# EAGLE board HM_Nightfall-mini_v1 (EAGLE 9.6.2)
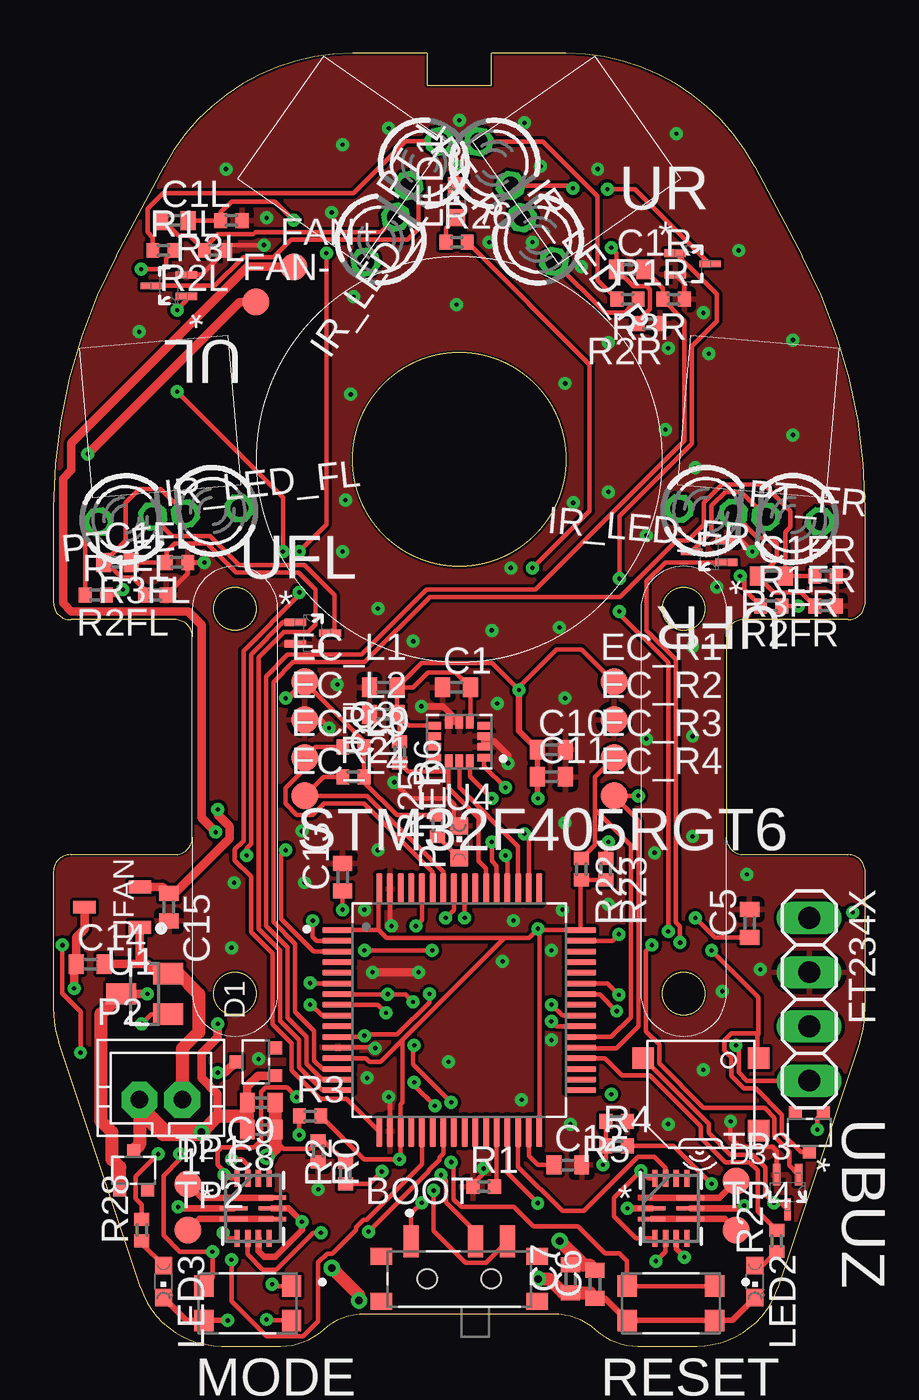
[diagram p0: board, top side]
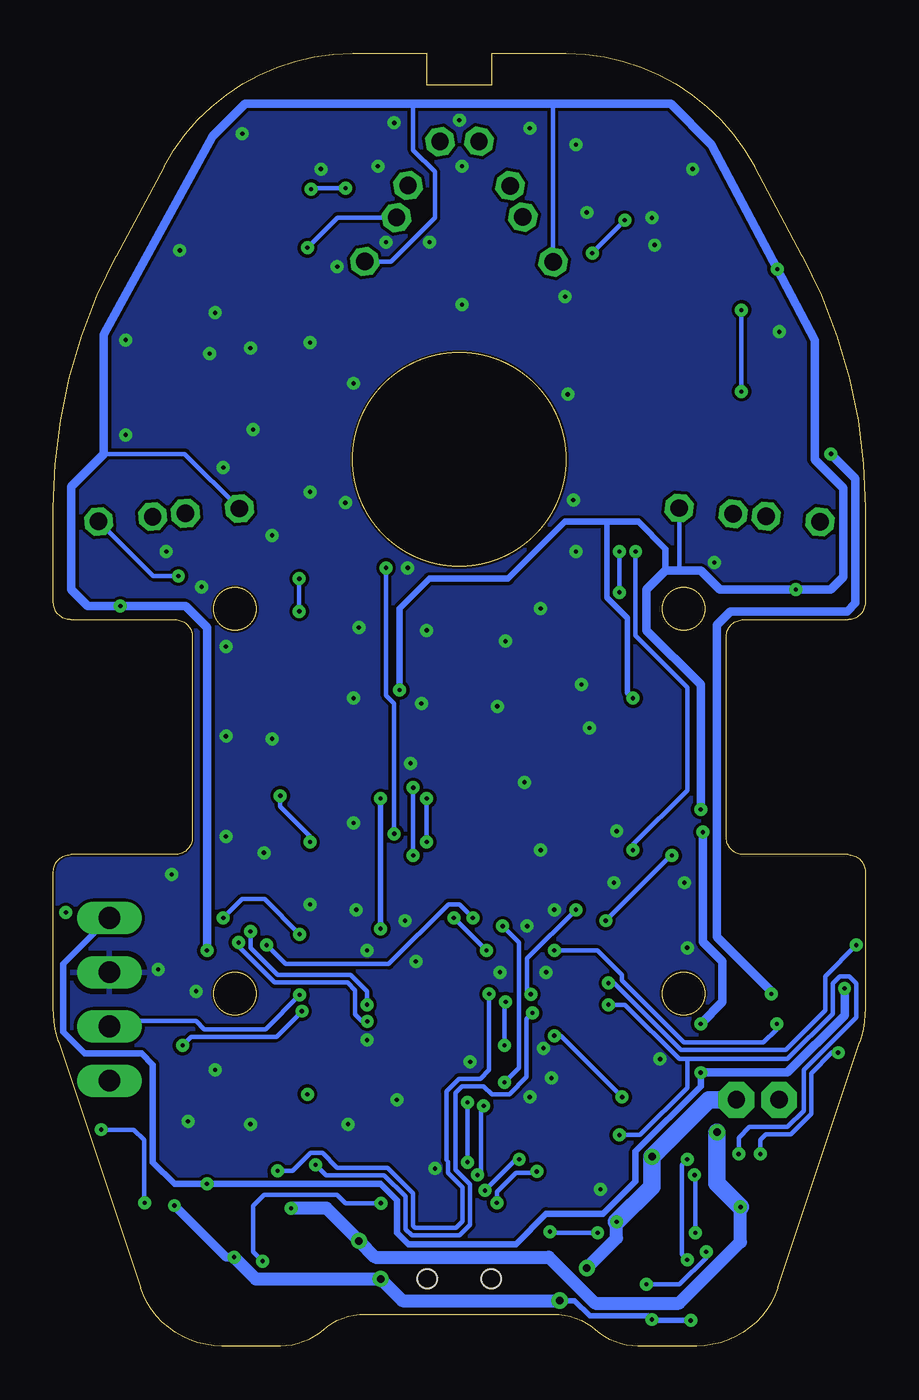
[diagram p1: board, bottom side, seen from below]

Size 38 x 60.5 mm. Coordinates in mm from the lower left corner, seen from the top.
Outline: 17.5,60.5 17.5,59 20.5,59 20.5,60.5 24,60.5 arc-62 32.82,55.21 35.06,51.02 arc-28 38,39.25 38,34.8 arc-90 37.2,34 32.3,34 arc90 31.5,33.2 31.5,23.8 arc90 32.3,23 37.2,23 arc-90 38,22.2 38,15.81 arc-18 37.74,14.23 33.91,2.73 arc-72 30.12,0 27.37,0 arc-41 25.39,0.75 arc41 23.4,1.5 14.6,1.5 arc41 12.61,0.75 arc-41 10.63,0 7.88,0 arc-72 4.09,2.73 0.26,14.23 arc-18 0,15.81 0,22.2 arc-90 0.8,23 5.7,23 arc90 6.5,23.8 6.5,33.2 arc90 5.7,34 0.8,34 arc-90 0,34.8 0,39.25 arc-28 2.94,51.02 5.18,55.21 arc-62 14,60.5 17.5,60.5
Outline: circle at 19,41.5 radius 5
Outline: circle at 8.5,16.5 radius 1
Outline: circle at 29.5,34.5 radius 1
Outline: circle at 29.5,16.5 radius 1
Outline: circle at 8.5,34.5 radius 1
Copper layers (1*16): Top 0.035mm / dielectric 1.5mm / Bottom 0.035mm
Design rules "default *": minimum track width 6mil, minimum drill 0.2mm, track to track 6mil, track to pad 6mil, pad to pad 6mil, via to via 6mil, smd to smd 6mil, copper to edge 0.1mm, drill to drill 0.15mm, minimum pad ring 10mil, minimum via ring 8mil, stop-mask expansion 4mil, vias tented up to drill 100mil, thermal gap 10mil
Net classes: 1 power: width 0.152 mm; 2 motor: width 0.152 mm

## Footprints (pad centres in the part's own frame; a part is rotated, then mirrored left to right if it is on the bottom)
SW_EG1215AA = smd 0.7 x 1.5: 1 -2.25,1.75; 2 0.75,1.75; 3 2.25,1.75 | smd 1 x 0.8: S1 -3.65,1.05; S2 -3.65,-1.05; S3 3.65,-1.05; S4 3.65,1.05 | hole 0.9: -1.5,0; 1.5,0
C0402 = smd 0.7 x 0.9: 1 -0.65,0; 2 0.65,0
SOT323 = smd 0.6 x 0.6: 1 -0.65,-0.925; 2 0.65,-0.925; 3 0,0.925
B1,27 = smd 1.27 x 1.27: TP 0,0
1X04 = drill 1.016 long: 1 -3.81,0; 2 -1.27,0; 3 1.27,0; 4 3.81,0
LED3MM = drill 0.813 octagon: A -1.27,0; K 1.27,0
CHIPLED_0603 = smd 0.8 x 0.8: A 0,-0.75; C 0,0.75
SW_TL6330AF200Q = smd 0.9 x 1: 1 -2.05,-0.8; 2 2.05,-0.8; 3 -2.05,0.8; 4 2.05,0.8
JST-PH2 = drill 0.813 pad 1.676 octagon: 1 1,0; 2 -1,0
R0402 = smd 0.6 x 0.7: 1 -0.5,0; 2 0.5,0
SMT-0540-S-R = smd 1 x 1: + 1.7,-2.7; - 1.7,2.7; M -1.7,-2.7
QFP50P1200X1200X160-64N = smd 1.47 x 0.28: 1 -5.67,3.75; 2 -5.67,3.25; 3 -5.67,2.75; 4 -5.67,2.25; 5 -5.67,1.75; 6 -5.67,1.25; 7 -5.67,0.75; 8 -5.67,0.25; 9 -5.67,-0.25; 10 -5.67,-0.75; 11 -5.67,-1.25; 12 -5.67,-1.75; 13 -5.67,-2.25; 14 -5.67,-2.75; 15 -5.67,-3.25; 16 -5.67,-3.75; 33 5.67,-3.75; 34 5.67,-3.25; 35 5.67,-2.75; 36 5.67,-2.25; 37 5.67,-1.75; 38 5.67,-1.25; 39 5.67,-0.75; 40 5.67,-0.25; 41 5.67,0.25; 42 5.67,0.75; 43 5.67,1.25; 44 5.67,1.75; 45 5.67,2.25; 46 5.67,2.75; 47 5.67,3.25; 48 5.67,3.75 | smd 0.28 x 1.47: 17 -3.75,-5.67; 18 -3.25,-5.67; 19 -2.75,-5.67; 20 -2.25,-5.67; 21 -1.75,-5.67; 22 -1.25,-5.67; 23 -0.75,-5.67; 24 -0.25,-5.67; 25 0.25,-5.67; 26 0.75,-5.67; 27 1.25,-5.67; 28 1.75,-5.67; 29 2.25,-5.67; 30 2.75,-5.67; 31 3.25,-5.67; 32 3.75,-5.67; 49 3.75,5.67; 50 3.25,5.67; 51 2.75,5.67; 52 2.25,5.67; 53 1.75,5.67; 54 1.25,5.67; 55 0.75,5.67; 56 0.25,5.67; 57 -0.25,5.67; 58 -0.75,5.67; 59 -1.25,5.67; 60 -1.75,5.67; 61 -2.25,5.67; 62 -2.75,5.67; 63 -3.25,5.67; 64 -3.75,5.67
SOT95P280X145-3N = smd 1.05 x 0.6: 1 -1.3,0.95; 2 -1.3,-0.95; 3 1.3,0
QFN-14_MP6551_MNP = smd 0.127 x 0.127: 1 -0.95,0.5 | smd 1.3 x 0.2: 2 -0.9,0; 3 -0.9,-0.5; 8 0.9,-0.5; 9 0.9,0; 10 0.9,0.5 | smd 0.25 x 0.8: 4 -0.75,-1.4; 5 -0.25,-1.4; 6 0.25,-1.4; 7 0.75,-1.4; 11 0.75,1.4; 12 0.25,1.4; 13 -0.25,1.4; 14 -0.75,1.4
PQFN50P250X300X86-14N = smd 0.61 x 0.35: 1 -1.16,0.75; 2 -1.16,0.25; 3 -1.16,-0.25; 4 -1.16,-0.75; 8 1.16,-0.75; 9 1.16,-0.25; 10 1.16,0.25; 11 1.16,0.75 | smd 0.35 x 0.61: 5 -0.5,-0.91; 6 0,-0.91; 7 0.5,-0.91; 12 0.5,0.91; 13 0,0.91; 14 -0.5,0.91
SOT50P160X90-3N = smd 1.016 x 0.356: 1 -0.813,0.508; 2 -0.813,-0.508 | smd 1.016 x 0.305: 3 0.813,0
SOT23 = smd 1 x 1.4: 1 -0.95,-1.1; 2 0.95,-1.1; 3 0,1.1

## Placement (x,y rotation side)
BOOT  EG1215AA  [SW_EG1215AA]  19,3.15 0 top
C1  0.1u  [C0402]  18.87,30.83 0 top
C1FL  0.1u  [C0402]  3,36.67 0 top
C1FR  0.1u  [C0402]  33.61,36.04 0 top
C1L  0.1u  [C0402]  5.66,52.68 0 top
C1R  0.1u  [C0402]  27,50.39 0 top
C2  0.1u  [C0402]  15.44,29.56 180 top
C3  2.2u  [C0402]  15.44,30.83 180 top
C5  2.2u  [C0402]  32.59,19.78 90 top
C6  0.1u  [C0402]  25.35,2.89 90 top
C7  10u  [C0402]  24.21,3.15 90 top
C8  0.1u  [C0402]  9.73,10.13 180 top
C9  10u  [C0402]  9.73,11.4 180 top
C10  10u  [C0402]  23.32,27.91 0 top
C11  0.1u  [C0402]  23.32,26.64 0 top
C12  2.2u  [C0402]  24.08,8.48 0 top
C13  0.1u  [C0402]  13.54,21.94 90 top
C14  1u  [C0402]  1.73,17.88 0 top
C15  2.2u  [C0402]  5.41,20.55 270 top
D1  BAS16WT1GW  [SOT323]  9.47,13.31 90 top
D2  BAS16WT1GW  [SOT323]  3.76,8.23 0 top
D3  BAS16WT1GW  [SOT323]  35.38,10 180 top
EC_L1  TPB1,27  [B1,27]  11.76,31.09 0 top
EC_L2  TPB1,27  [B1,27]  11.76,29.31 0 top
EC_L3  TPB1,27  [B1,27]  11.76,27.53 0 top
EC_L4  TPB1,27  [B1,27]  11.76,25.75 0 top
EC_R1  TPB1,27  [B1,27]  26.24,31.09 0 top
EC_R2  TPB1,27  [B1,27]  26.24,29.31 0 top
EC_R3  TPB1,27  [B1,27]  26.24,27.53 0 top
EC_R4  TPB1,27  [B1,27]  26.24,25.75 0 top
FAN+  TPB1,27  [B1,27]  11.25,50.52 0 top
FAN-  TPB1,27  [B1,27]  9.47,48.87 0 top
FT234X  [1X04]  35.38,16.23 270 top
IR_LED_FL  [LED3MM]  3.38,38.71 6 top
IR_LED_FR  [LED3MM]  34.62,38.71 175 top
IR_LED_L  [LED3MM]  17.35,55.34 235 top
IR_LED_R  [LED3MM]  20.65,55.34 306 top
LED1  [CHIPLED_0603]  18.87,53.57 0 top
LED2  [CHIPLED_0603]  32.84,3.02 180 top
LED3  [CHIPLED_0603]  5.16,3.02 180 top
MODE  TL6330AF200Q  [SW_TL6330AF200Q]  9.09,2 180 top
P2  [JST-PH2]  5.03,11.53 0 top
P-LED  [CHIPLED_0603]  19,23.59 0 top
PT_FL  [LED3MM]  7.44,39.09 186 top
PT_FR  [LED3MM]  30.56,39.09 355 top
PT_L  [LED3MM]  15.32,51.79 56 top
PT_R  [LED3MM]  22.68,51.79 126 top
R0  0  [R0402]  12.4,9.12 270 top
R1  10k  [R0402]  20.14,7.46 0 top
R1FL  10  [R0402]  1.98,35.15 0 top
R1FR  10  [R0402]  33.61,34.64 0 top
R1L  10  [R0402]  5.16,51.28 0 top
R1R  10  [R0402]  26.87,48.99 0 top
R2  10k  [R0402]  13.67,8.1 90 top
R2FL  20k  [R0402]  4.78,35.15 180 top
R2FR  20k  [R0402]  36.14,34.64 180 top
R2L  20k  [R0402]  7.57,51.28 180 top
R2R  20k  [R0402]  27.89,47.85 180 top
R3  10k  [R0402]  12.02,10.77 0 top
R3FL  3.3k  [R0402]  5.79,36.67 180 top
R3FR  3.3k  [R0402]  36.14,36.04 180 top
R3L  3.3k  [R0402]  8.33,52.68 180 top
R3R  3.3k  [R0402]  29.03,48.99 180 top
R4  22k  [R0402]  26.37,9.37 0 top
R5  10k  [R0402]  26.37,10.51 180 top
R6  10k  [R0402]  16.21,27.79 270 top
R20  470  [R0402]  14.05,28.04 0 top
R21  470  [R0402]  14.05,26.64 0 top
R22  470  [R0402]  24.71,22.32 270 top
R23  470  [R0402]  25.86,22.32 270 top
R25  1k  [R0402]  17.98,24.36 90 top
R26  1k  [R0402]  18.87,51.66 0 top
R27  1k  [R0402]  33.86,4.93 90 top
R28  1k  [R0402]  4.14,5.43 90 top
RESET  TL6330AF200Q  [SW_TL6330AF200Q]  28.91,2 180 top
SPK1  SMT-0540-S-R  [SMT-0540-S-R]  30.3,11.78 90 top
STM32F405RGT6  STM32F405RGT6  [QFP50P1200X1200X160-64N]  19,15.72 0 top
TP1  TPB1,27  [B1,27]  6.3,7.59 0 top
TP2  TPB1,27  [B1,27]  6.3,5.43 0 top
TP3  TPB1,27  [B1,27]  31.95,7.72 0 top
TP4  TPB1,27  [B1,27]  31.95,5.43 0 top
U1  AP2210N-3.3TRG1  [SOT95P280X145-3N]  2.74,20.55 180 top
U2  MP6551GQB-P  [QFN-14_MP6551_MNP]  28.91,6.45 0 top
U3  MP6551GQB-P  [QFN-14_MP6551_MNP]  9.35,6.45 0 top
U4  ISM330DHCXTR  [PQFN50P250X300X86-14N]  19,28.29 180 top
UBUZ  2N7002TQ-7-F  [SOT50P160X90-3N]  34.37,7.21 270 top
UFAN  2N7002K  [SOT23]  4.27,16.48 90 top
UFL  2N7002TQ-7-F  [SOT50P160X90-3N]  12.14,33.37 0 top
UFR  2N7002TQ-7-F  [SOT50P160X90-3N]  30.68,37.18 180 top
UL  2N7002TQ-7-F  [SOT50P160X90-3N]  5.41,49.63 180 top
UR  2N7002TQ-7-F  [SOT50P160X90-3N]  29.92,50.64 0 top

## Library data of the parts
BOOT = EG1215AA; AVAILABILITY: In Stock; CHECK_PRICES: https://www.snapeda.com/parts/EG1215AA/E-Switch/view-part/?ref=eda; DESCRIPTION: Slide Switch SPDT Surface Mount, Right Angle; MF: E-Switch; MP: EG1215AA; PACKAGE: None; PRICE: None; PURCHASE-URL: https://www.snapeda.com/api/url_track_click_mouser/?unipart_id=3210616&manufacturer=E-Switch&part_name=EG1215AA&search_term=eg1215aa; SNAPEDA_LINK: https://www.snapeda.com/parts/EG1215AA/E-Switch/view-part/?ref=snap
C1 C1FL C1FR C1L C1R C2 C3 C5-C15 = rcl; SPICEPREFIX: C
D1-D3 = BAS16WT1G; AVAILABILITY: In Stock; CHECK_PRICES: https://www.snapeda.com/parts/BAS16WT1G/Onsemi/view-part/?ref=eda; DESCRIPTION: DIODE, SIGNAL, 75V, SC70; Diode Type:Small Signal; Voltage, Vrrm:75V; Time, trr Typ:6ns; Voltage, Vf Max:1.25V; Temperature, Tj Max:150°C; Termination Type:SMD; Operating Temperature Range:-55°C to +150°C; Case Style:SC-70; No. of Pins:3; Voltage, Breakdown Max:75V; MF: ON Semiconductor; MP: BAS16WT1G; PACKAGE: SC-70-3 ON Semiconductor; PRICE: None; SNAPEDA_LINK: https://www.snapeda.com/parts/BAS16WT1G/Onsemi/view-part/?ref=snap
EC_L1-EC_L4 EC_R1-EC_R4 FAN+ FAN- TP1-TP4 = testpad
FT234X = pinhead
IR_LED_FL IR_LED_FR IR_LED_L IR_LED_R LED1-LED3 P-LED PT_FL PT_FR PT_L PT_R = led
MODE RESET = TL6330AF200Q; AVAILABILITY: In Stock; CHECK_PRICES: https://www.snapeda.com/parts/TL6330AF200Q/E-Switch/view-part/?ref=eda; DESCRIPTION: Tactile Switch SPST-NO Top Actuated Surface Mount; MF: E-Switch; MP: TL6330AF200Q; PACKAGE: None; PRICE: None; PURCHASE-URL: https://www.snapeda.com/api/url_track_click_mouser/?unipart_id=2720563&manufacturer=E-Switch&part_name=TL6330AF200Q&search_term=tl6330af200q; SNAPEDA_LINK: https://www.snapeda.com/parts/TL6330AF200Q/E-Switch/view-part/?ref=snap
P2 = jst-ph
R0 R1 R1FL R1FR R1L R1R R2 R2FL R2FR R2L R2R R3 R3FL R3FR R3L R3R R4-R6 R20-R23 R25-R28 = rcl; SPICEPREFIX: R
SPK1 = SMT-0540-S-R; DESCRIPTION: Buzzers Transducer, Externally Driven Electromechanical/Magnetic 3V 100mA 4kHz 78dB @ 3V, 10cm Surface Mount Solder Pads; DIGI-KEY_PART_NUMBER: 668-1060-1-ND; MF: PUI; MP: SMT-0540-S-R; PACKAGE: PUI; PURCHASE-URL: https://pricing.snapeda.com/search/part/SMT-0540-S-R/?ref=eda
STM32F405RGT6 = stm32_f405rgt6; AVAILABILITY: Unavailable; DESCRIPTION: ARM® Cortex®-M4 STM32F4 Microcontroller IC 32-Bit 168MHz 1MB (1M x 8) FLASH 64-LQFP (10x10); MF: STMicroelectronics; MP: STM32F405RGT6; PACKAGE: LQFP-64 STMicroelectronics; PRICE: None
U1 = AP2210N-3.3TRG1; AVAILABILITY: In Stock; CHECK_PRICES: https://www.snapeda.com/parts/AP2210N-3.3TRG1/Diodes+Inc./view-part/?ref=eda; DESCRIPTION: Voltage Regulators, LDO, 300mA CMOS LDO 3.3V 250mV | Diodes Inc AP2210N-3.3TRG1; MF: Diodes Inc.; MP: AP2210N-3.3TRG1; PACKAGE: SOT-23-3 Diodes Inc.; PRICE: None; PURCHASE-URL: https://www.snapeda.com/api/url_track_click_mouser/?unipart_id=492437&manufacturer=Diodes Inc.&part_name=AP2210N-3.3TRG1&search_term=ldo 3.3v; SNAPEDA_LINK: https://www.snapeda.com/parts/AP2210N-3.3TRG1/Diodes+Inc./view-part/?ref=snap
U2 U3 = MP6551; COPYRIGHT: Copyright (C) 2025 Ultra Librarian. All rights reserved.; MANUFACTURER_PART_NUMBER: MP6551GQB-P; MFR_NAME: Monolithic Power Systems
U4 = ISM330DHCXTR; AVAILABILITY: In Stock; CHECK_PRICES: https://www.snapeda.com/parts/ISM330DHCXTR/STMicroelectronics/view-part/?ref=eda; DESCRIPTION: Accelerometer, Gyroscope, Temperature, 6 Axis Sensor I2C, SPI Output; MF: STMicroelectronics; MP: ISM330DHCXTR; PACKAGE: VFLGA-14 STMicroelectronics; PRICE: None; SNAPEDA_LINK: https://www.snapeda.com/parts/ISM330DHCXTR/STMicroelectronics/view-part/?ref=snap
UBUZ UFL UFR UL UR = 2N7002TQ-7-F; AVAILABILITY: In Stock; CHECK_PRICES: https://www.snapeda.com/parts/2N7002TQ-7-F/Diodes+Inc./view-part/?ref=eda; DESCRIPTION: N-Channel 60 V 115mA (Ta) 150mW (Ta) Surface Mount SOT-523; MF: Diodes Inc.; MP: 2N7002TQ-7-F; PACKAGE: SOT-523 Diodes Inc.; PRICE: None; SNAPEDA_LINK: https://www.snapeda.com/parts/2N7002TQ-7-F/Diodes+Inc./view-part/?ref=snap
UFAN = nxp_60

## Nets
+3V3 [power]: BOOT.3 C1.2 C2.1 C3.1 C10.1 C11.1 C15.1 D3.3 EC_L1.TP EC_R1.TP PT_FL.A PT_FR.A PT_L.A PT_R.A R1FL.2 R1FR.2 R1L.2 R1R.2 R3.2 R6.1 R20.2 R21.2 R22.2 R23.2 R25.2 SPK1.+ STM32F405RGT6.1 STM32F405RGT6.13 STM32F405RGT6.19 STM32F405RGT6.32 STM32F405RGT6.48 STM32F405RGT6.64 U1.2 U4.5 U4.8
+5V [power]: C14.1 D1.3 FT234X.1 R4.2 U1.3
BOOT0: BOOT.2 STM32F405RGT6.60
BUZZER: STM32F405RGT6.57 UBUZ.1
CS: R6.2 STM32F405RGT6.54 U4.12
EC_L_A: EC_L4.TP R21.1 STM32F405RGT6.58
EC_L_B: EC_L3.TP R20.1 STM32F405RGT6.59
EC_R_A: EC_R4.TP R23.1 STM32F405RGT6.37
EC_R_B: EC_R3.TP R22.1 STM32F405RGT6.38
FAN: STM32F405RGT6.56 UFAN.1
GND [motor]: C1.1 C2.2 C3.2 C5.2 C10.2 C11.2 C12.2 C13.2 C15.2 EC_L2.TP EC_R2.TP FT234X.2 LED1.C P-LED.C R0.2 R1.1 R2FL.1 R2FR.1 R2L.1 R2R.1 R3FL.1 R3FR.1 R3L.1 R3R.1 R5.1 STM32F405RGT6.12 STM32F405RGT6.18 STM32F405RGT6.63 U4.2 U4.3 U4.6 U4.7 UBUZ.2 UFL.2 UFR.2 UL.2 UR.2
GND2 [motor]: C6.1 C7.1 C8.1 C9.1 C14.2 LED2.C LED3.C MODE.3 MODE.4 P2.1 R0.1 R2.2 RESET.3 RESET.4 U1.1 U2.6 U2.9 U3.6 U3.9 UFAN.2
IR_FL: STM32F405RGT6.2 UFL.1
IR_FR: STM32F405RGT6.39 UFR.1
IR_L: STM32F405RGT6.3 UL.1
IR_R: STM32F405RGT6.40 UR.1
LED_1: R26.2 STM32F405RGT6.50
LED_2: R27.2 STM32F405RGT6.36
LED_3: R28.2 STM32F405RGT6.6
MISO: STM32F405RGT6.52 U4.1
MOSI: STM32F405RGT6.53 U4.14
MOTOR_L_DIR: STM32F405RGT6.23 U3.5
MOTOR_L_OUT1 [motor]: TP1.TP U3.1 U3.10
MOTOR_L_OUT2 [motor]: TP2.TP U3.3 U3.8
MOTOR_L_PWM: STM32F405RGT6.21 U3.13
MOTOR_R_DIR: STM32F405RGT6.29 U2.5
MOTOR_R_OUT1 [motor]: TP3.TP U2.1 U2.10
MOTOR_R_OUT2 [motor]: TP4.TP U2.3 U2.8
MOTOR_R_PWM: STM32F405RGT6.30 U2.13
MOTOR_STBY: STM32F405RGT6.11 U2.4 U2.14 U3.4 U3.14
N$1: D2.1 FAN-.TP UFAN.3
N$2: IR_LED_FL.K UFL.3
N$3: C1FL.1 PT_FL.K R2FL.2
N$6: C1FR.1 PT_FR.K R2FR.2
N$8: IR_LED_FL.A R1FL.1
N$9: C1L.1 PT_L.K R2L.2
N$10: IR_LED_L.K UL.3
N$12: C1R.1 PT_R.K R2R.2
N$13: C5.1 STM32F405RGT6.47
N$14: C12.1 STM32F405RGT6.31
N$15 [motor]: R1.2 STM32F405RGT6.28
N$16: IR_LED_L.A R1L.1
N$18: IR_LED_FR.K UFR.3
N$19: BOOT.1 R2.1
N$21: P-LED.A R25.1
N$23: D3.1 SPK1.- UBUZ.3
N$27: LED1.A R26.1
N$28: IR_LED_FR.A R1FR.1
N$29: IR_LED_R.K UR.3
N$30: IR_LED_R.A R1R.1
N$36: LED2.A R27.1
N$41: LED3.A R28.1
PC_RX: FT234X.4 STM32F405RGT6.42
PC_TX: FT234X.3 STM32F405RGT6.43
PUSH_IN_1: MODE.1 MODE.2 R3.1 STM32F405RGT6.9
PUSH_IN_2: STM32F405RGT6.10
RESET: C13.1 RESET.1 RESET.2 STM32F405RGT6.7
SCK: STM32F405RGT6.51 U4.13
SENSOR_FL: C1FL.2 R3FL.2 STM32F405RGT6.16
SENSOR_FR: C1FR.2 R3FR.2 STM32F405RGT6.14
SENSOR_L: C1L.2 R3L.2 STM32F405RGT6.17
SENSOR_R: C1R.2 R3R.2 STM32F405RGT6.15
SWCL: STM32F405RGT6.49
SWDIO: STM32F405RGT6.46
VM [power]: C6.2 C7.2 C8.2 C9.2 D1.1 D2.3 FAN+.TP P2.2 U2.2 U3.2
VOL_CHECK: R4.1 R5.2 STM32F405RGT6.8

## Tracks (layer width: path | path; a pad name or v marks a point on that pad's centre or on a via)
+3V3  (via drill 0.2)
  Top 0.2: 22.74,19.47 STM32F405RGT6.48 24.67,21.78 R22.2 R23.2 | 22.74,19.47 v22.68,19.53 22.25,19.1 21.11,19.1 | STM32F405RGT6.1 15.23,19.47 | 15.23,19.47 15.6,19.1 21.11,19.1 | STM32F405RGT6.13 14.65,13.47 14.81,13.31 15.32,13.31 16.33,14.32 | 16.33,14.32 21.11,19.1 | 16.33,14.32 16.33,11.4 16.25,11.32 STM32F405RGT6.19 16.25,8.79 v16.19,8.74 14.54,8.74 R3.2 | STM32F405RGT6.32 22.75,19.46 22.74,19.47 | R1FR.2 v34.86,34.64 v34.87,34.63 | R1FL.2 3,35.15 v3.25,35.41 | BOOT.3 20.25,3.89 19.3,3.89 17.8,5.39 v17.8,7.28 | STM32F405RGT6.64 15.23,21.37 15.23,19.47 | EC_L1.TP 14.55,28.3 R20.2 R21.2 14.55,26.39 16.08,24.86 R25.2 | v30.81,18.51 33,16.32 33,14.58 32.95,14.62 | EC_R1.TP 24.71,32.61 23.56,32.61 21.79,30.85 v21.79,30.71 20.52,31.98 17.24,31.98 C3.1 | R1R.2 26.93,48.55 26.93,48.54 26.75,48.36 25.83,48.36 PT_R.A | R1L.2 5.28,50.91 5.28,50.52 5.17,50.41 v4.11,50.41 | D3.3 34.98,9.08 34.11,9.96 34.11,10.83 32.88,12.07 32.32,12.07 31.73,12.65 31.73,13.51 31.4,13.84 31.4,14.3 31.72,14.62 32.95,14.62 | 32.95,14.62 32.95,13.53 SPK1.+ | 19.65,30.96 C1.2 | 19.43,29.28 U4.5 19.52,29.23 C1.2 | C3.1 C2.1 | C2.1 16.61,29.04 U4.8 | C3.1 16.84,30.83 17.54,31.54 18.82,31.54 C1.2 | C2.1 16.21,29.45 R6.1
  Top 0.254: C10.1 C11.1 22.67,25.64 v22.68,25.63 | EC_L1.TP 11,30.32 v10.87,30.32
  Top 0.305: C10.1 21.79,28.79 v21.79,30.71
  Top 0.406: v7.7,25.12 7.7,24.88 8.25,24.33 8.25,23.77 5.68,21.2 C15.1 5.11,21.5 U1.2
  Bottom 0.2: PT_FL.A 8.71,36.3 8.71,36.29 | PT_R.A 22.19,50.76 20.14,52.8 20.14,54.96 21.16,55.98 21.16,58.14 | PT_L.A 14.61,58.06 14.68,58.14 | PT_FR.A 31.85,41.76 35.64,41.76 | v17.8,7.28 16.34,8.74 v16.19,8.74
  Bottom 0.254: v22.68,25.63 v22.68,19.53 | v10.87,30.32 11.13,30.58 11.13,34.07 12.09,35.04 12.09,38.53 12.14,38.58
  Bottom 0.305: v21.79,30.71 21.79,34.52 20.4,35.91 16.71,35.91 14.05,38.58 12.14,38.58 10.62,38.58 9.35,37.31 9.35,36.29
  Bottom 0.406: v7.7,25.12 7.7,30.96 10.24,33.5 10.24,35.41 9.35,36.29 8.71,36.29 7.7,36.29 6.81,35.41 v3.25,35.41 1.6,35.41 1.02,35.99 1.02,40.16 2.36,41.5 2.36,47.09 v4.11,50.41 7.19,56.23 9.09,58.14 14.68,58.14 21.16,58.14 29.03,58.14 30.56,56.61 35.64,47.34 35.64,41.76 37.16,40.23 37.16,35.41 36.39,34.63 v34.87,34.63 31.82,34.63 30.81,33.63 v30.81,18.51
+5V  (via drill 0.2)
  Top 0.2: R4.2 29.03,9.37 v30.81,7.59
  Top 0.406: D1.3 8.04,12.8 v7.7,12.8 | v0.97,16.74 0.97,17.77 C14.1 1.08,19.13 1.47,19.53 1.47,20.52 U1.3
  Bottom 0.305: FT234X.1 37.54,17.88 37.54,14.7 36.53,13.69 33.87,13.69 33.35,13.16 33.35,8.61 32.34,7.59 v30.81,7.59 22.68,7.59 21.92,6.83 21.92,5.31 21.39,4.77 16.36,4.77 14.94,6.2 12.27,6.2 10.74,7.72 10.74,9.11 7.7,12.15 v7.7,12.8
  Bottom 0.406: v7.7,12.8 3.63,12.8 0.97,15.47 v0.97,16.74
BOOT0  (via drill 0.2)
  Top 0.2: BOOT.2 19.75,5.35 18.39,6.72 18.39,7.77 v18.15,8.01 | v17.86,11.24 16.89,12.21 v16.89,12.35 | STM32F405RGT6.60 17.25,19.94 v16.97,19.66
  Bottom 0.2: v18.15,8.01 17.98,8.17 17.98,11.11 v17.86,11.24 | v16.89,12.35 16.21,13.03 16.21,18.89 v16.97,19.66
BUZZER  (via drill 0.2)
  Top 0.2: UBUZ.1 34.45,8.45 34.45,9.12 33.76,9.81 33.76,10.69 33.3,11.15 30.44,11.15 28.36,13.23 28.36,14.11 27.73,14.73 27.73,18.48 v28.02,18.77 | STM32F405RGT6.57 18.75,20.42 v18.36,20.04
  Bottom 0.2: v28.02,18.77 27.13,17.88 22.3,17.88 19.51,20.67 19,20.67 v18.36,20.04
CS
  Top 0.2: STM32F405RGT6.54 20.25,22.34 19.89,22.7 19.89,24.73 18.5,26.12 18.5,26.9 | 18.5,26.9 U4.12 | R6.2 16.59,26.9 18.5,26.9
EC_L_A
  Top 0.2: STM32F405RGT6.58 18.25,22.19 14.68,25.75 EC_L4.TP 12.65,26.64 R21.1
EC_L_B
  Top 0.2: STM32F405RGT6.59 17.75,22.19 14.54,25.4 12.66,25.4 12.13,24.87 11.39,24.87 10.87,25.38 10.87,26.12 11.76,27.01 EC_L3.TP 12.27,28.04 R20.1
EC_R_A  (via drill 0.2)
  Top 0.2: STM32F405RGT6.37 24.7,13.94 26.37,13.94 27.38,14.96 27.38,24.61 EC_R4.TP v27.38,25.75 | R23.1 25.86,23.47 v25.98,23.59
  Bottom 0.2: v25.98,23.59 25.98,23.85 27.38,25.24 v27.38,25.75
EC_R_B
  Top 0.2: STM32F405RGT6.38 26.11,14.47 27.03,15.39 27.03,23.44 25.35,25.12 | 25.35,25.12 25.35,26.64 EC_R3.TP | R22.1 25.35,23.46 25.35,25.12
FAN  (via drill 0.2)
  Top 0.2: UFAN.1 4.59,15.53 v4.14,15.09 | v14.55,18.51 v17.73,18.51 | v19.25,20.04 STM32F405RGT6.56
  Bottom 0.2: v4.14,15.09 4.14,14.83 4.76,14.21 8.49,14.21 11.38,17.11 11.38,17.37 12.52,18.51 v14.55,18.51 | v17.73,18.51 v19.25,20.04
GND  (via drill 0.2)
  Top 0.2: STM32F405RGT6.12 15.04,13.97 v15.06,13.94 | STM32F405RGT6.18 15.75,11.6 v15.7,11.66 | STM32F405RGT6.63 15.75,19.73 v15.82,19.66 | R1.1 19.64,7.59 20.14,8.09 v20.14,8.31 | v7.06,36.67 R3FL.1 6.29,36.17 R2FL.1 | LED1.C v18.87,55.22 | UBUZ.2 33.86,9.12 33.64,9.33 32.12,9.33 31.7,9.75 v31.7,10.51 | UR.2 29.53,49.71 R3R.1 | UL.2 6.93,50.14 7.62,50.83 R2L.1 8.32,51.53 v9.86,51.53 | EC_L2.TP 12.52,29.31 v12.9,28.93 | P-LED.C 18.75,24.6 18.75,25.37 18.49,25.63 16.71,25.63 v15.95,26.39 | UFR.2 32.21,37.69 v32.72,37.18 | U4.7 18.75,29.2 U4.6 | U4.3 20.16,28.29 U4.2
  Top 0.305: 18.75,29.2 18.75,29.44 18.24,29.94 v17.22,29.94 | 20.16,28.29 20.65,28.29 21.29,27.66 v21.29,27.28
  Top 0.406: v14.94,17.5 v17.09,17.5
  other vias: 13.54,56.23 8.08,55.09 13.03,53.06 9.98,52.8 4.01,47.47 14.05,49.12 13.92,44.55 18.87,48.74 20.4,51.66 15.7,57 22.05,57.25 22.81,55.22 25.48,55.09 29.16,56.74 13.67,39.6 13.54,37.18 15.19,34.52 16.84,32.99 20.52,33.5 13.29,30.96 23.95,45.06 25.98,46.96 24.71,50.52 22.43,51.66 19,57.38 32.08,51.28 30.43,48.36 34.62,47.09 34.62,42.64 28.65,42.9 25.98,39.98 24.33,39.47 21.41,36.42 31.06,35.53 29.92,32.74 23.7,33.63 27.76,28.42 29.92,28.55 23.95,24.48 29.92,23.85 25.98,20.67 32.46,22.07 31.32,16.61 33.1,17.62 30.43,12.93 23.32,18.51 23.32,14.32 24.21,10.39 21.54,19.91 11.76,21.69 11.63,24.1 8.33,18.64 14.68,12.55 12.4,7.34 28.78,10.39 30.05,41.12 28.78,46.71 30.68,46.45 15.19,23.21 28.14,23.09 27.76,37.95 8.46,21.69 14.55,20.42 23.83,20.42 18.49,13.31 21.03,18.01 21.92,11.53 9.6,13.43 20.78,30.07 23.95,30.32
  pour Top: -5.51,67.28 43.51,67.28 43.51,-4.6 -5.51,-4.6
  pour Bottom: -6.27,68.04 44.27,68.04 44.27,-5.23 -6.27,-5.23
GND2  (via drill 0.2, 0.35)
  Top 0.2: 10.38,9.62 10.77,9.23 12.02,9.23 R0.1 12.65,9.62 R2.2 | MODE.4 | MODE.3 10.02,1.2 v9.98,1.24
  Top 0.254: v8.16,1.2 MODE.4 | MODE.4 6.22,1.2 LED3.C | C6.1 25.82,2.24 RESET.4 RESET.3 31.78,1.2 LED2.C | v29.54,4.16 29.16,4.55 U2.6
  Top 0.305: U2.9 32.21,6.45 v32.34,6.58 | U3.9 11,6.45 v11.63,5.81 11.63,5.43 10.39,4.19 9.86,4.19 9.6,4.45 U3.6
  Top 0.406: UFAN.2 4.84,17.43 4.39,17.88 4.01,17.88 | 4.01,17.88 C14.2 | U1.1 4.04,17.91 4.01,17.88
  Top 0.61: C9.1 C8.1 10.38,9.62 10.38,9.26 v9.98,8.86 | v22.68,3.15 23.19,3.15 23.84,2.5 C7.1 25.1,2.5 C6.1 | v14.3,2.13 14.3,2.39 v13.03,3.66 | UFAN.2 5.86,17.43 6.81,16.48 6.81,14.7 6.03,13.93 P2.1
  Bottom 0.254: v14.3,2.13 13.6,2.13 12.89,1.42 10.16,1.42 v9.98,1.24 9.94,1.2 v8.16,1.2
  Bottom 0.406: v32.34,6.58 29.92,4.16 v29.54,4.16
  Bottom 0.61: v29.54,4.16 28.52,3.15 v22.68,3.15 21.67,2.13 v14.3,2.13 | v13.03,3.66 11.63,5.05 v11.63,5.81
  Bottom 0.813: v11.63,5.81 9.98,7.46 v9.98,8.86 7.32,11.53 P2.1
IR_FL  (via drill 0.2)
  Top 0.2: STM32F405RGT6.2 12.32,18.97 12.14,19.15 v12.14,19.91 | v9.05,22.96 9.05,23.29 9.25,23.5 9.25,32.38 10.76,33.88 UFL.1
  Bottom 0.2: v12.14,19.91 9.09,22.96 v9.05,22.96
IR_FR  (via drill 0.2)
  Top 0.2: UFR.1 28.64,36.67 27.76,35.8 27.76,33.5 29.13,32.13 29.13,19.84 29.34,19.63 v29.34,18.88 | STM32F405RGT6.39 23.54,14.97 v23.31,15.2
  Bottom 0.2: v29.34,18.88 29.34,18.7 27.66,17.02 24.24,17.02 23.87,16.66 23.87,15.51 23.56,15.2 v23.31,15.2
IR_L  (via drill 0.2)
  Top 0.2: UL.1 6.22,48.92 v5.79,48.49 | STM32F405RGT6.3 12.18,18.47 10.66,19.99 10.66,23 v10.87,23.21 | v10.74,37.18 10.74,39.72 v5.79,44.68
  Bottom 0.2: v5.79,48.49 v5.79,44.68 | v10.87,23.21 10.87,23.47 8.33,26.01 8.33,30.83 10.74,33.25 v10.74,37.18
IR_R  (via drill 0.2)
  Top 0.2: UR.1 29.7,50.57 29.72,50.57 31.06,49.22 31.06,47.98 29.89,46.81 29.89,42.24 26.49,38.84 v26.49,35.91 | v26.49,34.39 26.49,34.27 28.78,31.99 v28.78,19.4 | STM32F405RGT6.40 23.82,15.47 v23.32,15.97
  Bottom 0.2: v26.49,35.91 v26.49,34.39 | v28.78,19.4 28.78,18.64 27.51,17.37 24.08,17.37 23.32,16.61 v23.32,15.97
LED_1  (via drill 0.2)
  Top 0.2: STM32F405RGT6.50 22.25,23.77 v22.05,23.98 | v22.43,36.42 25.1,39.09 25.1,45.94 R26.2
  Bottom 0.2: v22.05,23.98 22.05,30.07 22.43,30.45 v22.43,36.42
LED_2
  Top 0.2: R27.2 32.97,6.31 32.97,8.23 32.59,8.61 31.45,8.61 30.3,9.75 30.3,10.29 27.92,12.67 26.62,12.67 25.82,13.47 STM32F405RGT6.36
LED_3  (via drill 0.2)
  Top 0.2: R28.2 4.14,6.61 3.86,6.9 3.86,7.94 v4.9,8.99 | v1.27,13.73 1.27,15.65 0.41,16.51 0.41,16.97 0.42,16.98 v0.42,18.77 | STM32F405RGT6.6 12.02,16.97 v12.02,16.99
  Bottom 0.2: v4.9,8.99 4.9,9.65 4.65,9.91 3.49,9.91 2.52,10.88 2.52,12.77 1.55,13.73 v1.27,13.73 | v0.42,18.77 1.87,17.31 1.87,15.7 3.71,13.86 8.63,13.86 11.76,16.99 v12.02,16.99
MISO  (via drill 0.2)
  Top 0.2: STM32F405RGT6.52 21.25,22.87 v21.16,22.96 | U4.1 20.16,27.13 v21.16,26.13
  Bottom 0.2: v21.16,22.96 v21.16,26.13
MOSI  (via drill 0.2)
  Top 0.2: STM32F405RGT6.53 20.75,22.48 20.52,22.7 v20.52,23.59 | U4.14 19.5,26.65 v20.52,25.63
  Bottom 0.2: v20.52,23.59 v20.52,25.63
MOTOR_L_DIR  (via drill 0.2)
  Top 0.2: v12.52,5.31 12.16,5.31 10.44,3.58 9.8,3.58 9.09,4.29 U3.5 | STM32F405RGT6.23 18.25,9.02 18.06,8.84 18.06,8.71 17.59,8.24 17.59,8.19 v14.76,5.36
  Bottom 0.2: v12.52,5.31 14.71,5.31 v14.76,5.36
MOTOR_L_OUT1
  Top 0.305: TP1.TP 6.94,6.95 U3.1 U3.10
MOTOR_L_OUT2
  Top 0.305: TP2.TP 6.82,5.95 U3.3 U3.8
MOTOR_L_PWM  (via drill 0.2)
  Top 0.2: STM32F405RGT6.21 17.25,8.51 14.65,5.91 14.53,5.91 14.17,5.56 14.17,5.43 13.29,4.55 13.28,4.55 13.05,4.32 12.8,4.32 12.4,3.92 12.4,1.15 11.7,0.45 9.99,0.45 8.33,2.11 v8.33,4.04 | v8.33,8.73 8.84,8.73 9.1,8.48 U3.13
  Bottom 0.2: v8.33,8.73 8.59,8.48 8.59,4.29 v8.33,4.04
MOTOR_R_DIR  (via drill 0.2)
  Top 0.2: STM32F405RGT6.29 21.25,8.11 v22.67,6.69 | U2.5 28.66,4.42 v28.21,3.97
  Bottom 0.2: v22.67,6.69 24.32,6.69 24.71,7.08 28.14,7.08 28.65,6.58 28.65,4.42 v28.21,3.97
MOTOR_R_OUT1
  Top 0.305: U2.1 U2.10 31.18,6.95 TP3.TP
MOTOR_R_OUT2
  Top 0.305: U2.3 U2.8 31.44,5.95 TP4.TP
MOTOR_R_PWM
  Top 0.2: STM32F405RGT6.30 21.75,8.4 23.83,6.32 24.82,6.32 27.37,8.86 28.14,8.86 28.66,8.35 U2.13
MOTOR_STBY  (via drill 0.2)
  Top 0.2: U3.14 8.33,7.85 8.08,8.1 | 8.08,8.1 7.7,8.48 7.7,9.12 7.87,9.29 9.4,9.29 9.73,9.62 9.73,11.91 9.92,12.11 10.93,12.11 v11.38,11.66 | STM32F405RGT6.11 14.5,14.47 v14.55,14.53 14.61,14.58 16.09,14.58 17.6,16.09 v17.6,16.48 | U3.4 8.21,5.05 v7.95,5.31 | v7.99,8.01 8.08,8.1 | U2.14 27.86,7.85 v27.51,8.2 26.24,6.93 26.24,6.07 27.26,5.05 U2.4
  Bottom 0.2: v14.55,14.53 14.25,14.53 v11.38,11.66 | v7.95,5.31 7.95,7.97 v7.99,8.01 | v17.6,16.48 17.6,12.93 18.01,12.52 19.02,12.52 19.61,11.93 19.61,8.71 19.53,8.63 19.53,8.11 18.84,7.42 18.84,5.83 19.15,5.53 21.08,5.53 21.16,5.62 21.16,7.14 22.37,8.35 24.71,8.35 25.41,9.04 25.95,9.04 26.8,8.2 v27.51,8.2
N$1  (via drill 0.2)
  Top 0.406: UFAN.3 v4.39,16.48 | v1.6,41.76 8.71,48.87 FAN-.TP
  Top 0.61: D2.1 3.11,8.37 2.74,8.73 2.74,10 2.24,10.51 2.24,15.55 UFAN.3
  Bottom 0.406: v4.39,16.48 4.39,16.61 6.94,19.15 6.94,33.75 6.3,34.39 0.84,34.39 0.46,34.77 0.46,40.61 v1.6,41.76
N$2
  Top 0.2: IR_LED_FL.K 5.57,37.91 7.33,37.91 8.7,36.55 11.76,36.55 13.16,35.15 13.16,33.58 UFL.3
N$3
  Top 0.2: R2FL.2 4.28,35.41 3.71,35.97 3.19,35.97 2.49,36.67 C1FL.1 3.38,37.71 3.38,39.47 4.01,40.1 5.03,40.1 PT_FL.K
N$6
  Top 0.2: C1FR.1 33.03,35.97 | 33.03,35.97 33.72,35.28 35.01,35.28 R2FR.2 | PT_FR.K 32.98,37.82 33.61,37.82 33.86,37.56 33.86,36.8 33.03,35.97
N$8
  Top 0.2: R1FL.1 1.48,37.94 IR_LED_FL.A
N$9
  Top 0.2: 7,51.35 6.38,51.98 5.86,51.98 5.16,52.68 C1L.1 | 7,51.35 R2L.2 | 7,51.35 7.63,51.98 7.7,52.04 9.36,52.04 9.46,52.14 15.33,52.14 PT_L.K
N$10
  Top 0.2: IR_LED_L.K 17.09,53.83 17.09,52.3 16.59,51.79 11.13,51.79 10.31,50.97 8.9,50.97 7.56,49.63 UL.3
N$12  (via drill 0.2)
  Top 0.2: R2R.2 27.39,48 27.93,48.54 27.93,49.45 27.78,49.6 27.15,49.6 C1R.1 26.35,51.17 v26.11,51.41
  Bottom 0.2: PT_R.K 24.7,52.81 v26.11,51.41
N$13  (via drill 0.2)
  Top 0.2: STM32F405RGT6.47 26.17,18.97 v26.47,19.28 | v30.05,20.04 30.95,19.13 C5.1
  Bottom 0.2: v30.05,20.04 29.16,20.93 28.12,20.93 v26.47,19.28
N$14
  Top 0.2: STM32F405RGT6.31 22.25,8.91 22.68,8.48 C12.1
N$15
  Top 0.2: STM32F405RGT6.28 20.75,7.57 R1.2
N$16
  Top 0.2: R1L.1 4.66,51.88 4.41,52.12 4.41,53.23 5.13,53.95 14.05,53.95 16.48,56.38 IR_LED_L.A
N$18
  Top 0.2: UFR.3 30.81,38.12 30.81,39.34 31.45,39.98 32.2,39.98 IR_LED_FR.K
N$19  (via drill 0.2)
  Top 0.2: BOOT.1 16.75,6.21 v17.24,6.7 | v15.37,8.17 14.8,7.6 R2.1
  Bottom 0.2: v17.24,6.7 17.24,7.21 16.36,8.1 15.44,8.1 v15.37,8.17
N$21
  Top 0.2: R25.1 P-LED.A
N$23  (via drill 0.2)
  Top 0.2: SPK1.- 30.68,10.4 30.68,9.98 31.7,8.96 32.73,8.96 33.32,8.37 33.32,7.11 v33.73,6.7 34.06,6.7 UBUZ.3 | D3.1 35.76,10.66 v35.76,10.13
  Bottom 0.2: v35.76,10.13 34.24,10.13 33.76,9.65 33.76,6.73 v33.73,6.7
N$27
  Top 0.2: R26.1 18.37,52.32 LED1.A
N$28  (via drill 0.2)
  Top 0.2: R1FR.1 32.34,35.41 32.34,35.85 v32.15,36.04
  Bottom 0.2: v32.15,36.04 33.33,36.04 IR_LED_FR.A
N$29  (via drill 0.2)
  Top 0.2: IR_LED_R.K 24.2,54.32 v24.32,54.19 | v25.93,54.15 27.23,54.15 UR.3
  Bottom 0.2: v24.32,54.19 25.89,54.19 v25.93,54.15
N$30
  Top 0.2: R1R.1 25.48,49.89 25.48,53.82 22.93,56.37 IR_LED_R.A
N$36
  Top 0.2: LED2.A 33.2,3.77 R27.1
N$41
  Top 0.2: LED3.A 4.14,4.79 R28.1
N$45  (via drill 0.2)
  other vias: 37.41,20.29
N$51  (via drill 0.2)
  other vias: 26.11,11.78
PC_RX  (via drill 0.2)
  Top 0.2: STM32F405RGT6.42 25.57,16.47 v26.37,15.68 | v31.95,14.07 32.08,13.94 32.08,12.8 32.46,12.42 FT234X.4
  Bottom 0.2: v26.37,15.68 27.56,14.48 31.54,14.48 v31.95,14.07
PC_TX  (via drill 0.2)
  Top 0.2: STM32F405RGT6.43 25.94,16.97 v26.47,16.43
  Bottom 0.2: v26.47,16.43 28.08,14.83 30.94,14.83 31.32,15.21 35.13,15.21 FT234X.3
PUSH_IN_1  (via drill 0.2)
  Top 0.2: MODE.1 10.33,2.8 v10.24,2.89 | MODE.2 7.44,3.2 v7.44,4.42 5.92,4.42 5.16,5.18 5.16,7.97 5.92,8.73 v5.92,8.99 | STM32F405RGT6.9 12.57,15.47 12.06,15.97 v12.02,15.97 | R3.1 v11.51,9.88
  Bottom 0.2: v10.24,2.89 8.69,2.89 7.44,4.14 v7.44,4.42 | v5.92,8.99 5.92,9.75 5.41,10.26 3.63,10.26 2.87,11.02 2.87,12.92 0.41,15.38 0.41,16.97 0.74,17.29 1.2,17.29 1.52,16.97 1.52,15.55 3.64,13.43 8.33,13.43 | 8.33,13.43 8.7,13.43 11.24,15.97 v12.02,15.97 | v11.51,9.88 10.54,9.88 8.33,12.09 8.33,13.43
RESET  (via drill 0.2)
  Top 0.2: RESET.1 RESET.2 26.86,3.98 26.49,4.34 25.82,4.34 24.55,5.62 22.46,5.62 21.57,6.51 19.09,6.51 18.74,6.86 18.74,8.49 v18.62,8.61 | v18.62,11.4 16.84,13.18 16.84,14.02 v16.89,14.07 | v16.83,16.11 16.47,16.47 v15.65,16.47 STM32F405RGT6.7 | C13.1 v13.54,20.42
  Bottom 0.2: v18.62,8.61 v18.62,11.4 | v16.89,14.07 16.89,16.11 v16.83,16.11 | v15.65,16.47 15.69,16.47 15.82,16.61 15.82,18.13 v13.54,20.42
SCK
  Top 0.2: STM32F405RGT6.51 21.75,23.38 19,26.13 U4.13
SENSOR_FL
  Top 0.2: C1FL.2 R3FL.2 5.29,37.19 5.66,37.56 7.19,37.56 8.55,36.2 11.48,36.2 12.27,35.41 12.27,33.78 11.91,33.42 10.79,33.42 9.6,32.23 9.6,19.53 10.62,18.51 10.62,15.21 11.51,14.32 11.51,13.05 12.59,11.97 STM32F405RGT6.16
SENSOR_FR
  Top 0.2: R3FR.2 C1FR.2 34.26,38.09 34.49,38.33 34.49,39.09 33.25,40.33 31.3,40.33 30.46,39.49 30.46,38.45 29.7,37.69 29.16,37.69 26.52,35.05 17.62,35.05 14.57,32.01 11.22,32.01 10.31,31.09 10.31,19.84 11.32,18.82 11.32,15.63 12.21,14.74 12.21,13.36 12.6,12.97 STM32F405RGT6.14
SENSOR_L  (via drill 0.2)
  Top 0.2: C1L.2 R3L.2 7.83,53.07 8.33,53.57 10.38,53.57 v11.25,52.7 | v11.51,35.28 11.51,35.14 8.9,32.53 8.9,23.65 8.49,23.24 8.49,22.73 9.25,21.97 9.25,19.38 10.27,18.37 10.27,15.07 11.16,14.18 11.16,12.91 12.48,11.58 13.72,11.58 STM32F405RGT6.17 | v11.51,37.18 12.78,38.45 v12.78,51.15
  Bottom 0.2: v11.25,52.7 12.78,51.17 v12.78,51.15 | v11.51,35.28 v11.51,37.18
SENSOR_R
  Top 0.2: C1R.2 28.53,49.51 R3R.2 28.98,48.55 28.98,48.54 29.54,47.98 29.54,42.39 22.56,35.41 17.48,35.41 14.43,32.36 10.97,32.36 9.95,31.34 9.95,19.68 10.97,18.66 10.97,15.36 11.86,14.47 11.86,13.21 12.6,12.47 STM32F405RGT6.15
VM  (via drill 0.2, 0.35)
  Top 0.305: v26.87,6.45 U2.2 | U3.2 5.9,6.45 v5.84,6.51
  Top 0.406: C9.2 9.08,12.15 9.59,12.66 D1.1 | 7.7,10.77 7.7,11.78 6.94,12.55 6.94,13.69 7.7,14.45 v7.7,15.09 | FAN+.TP 9.09,50.52 0.84,42.27 0.84,40.99 0.46,40.61 0.46,34.77 0.84,34.39 6.3,34.39 6.94,33.75 6.94,24.71 v7.59,24.06
  Top 0.61: C9.2 9.08,10.77 | 9.08,10.77 C8.2 | v6.94,10 7.7,10.77 9.08,10.77 | C7.2 24.83,3.8 | C6.2 25.1,3.8 24.83,3.8 | v23.7,4.93 24.83,3.8 | P2.2 4.03,9.42 D2.3
  Top 0.813: P2.2 4.03,11.13 5.16,10 v6.94,10
  Bottom 0.406: v7.7,15.09 6.68,16.1 6.68,18.01 7.59,18.92 v7.59,24.06
  Bottom 0.61: v5.84,6.51 5.84,4.88 8.71,2 12.65,2 14.81,4.16 22.94,4.16 v23.7,4.93 25.22,6.45 v26.87,6.45
  Bottom 0.813: v6.94,10 6.94,7.61 v5.84,6.51
VOL_CHECK  (via drill 0.2)
  Top 0.2: STM32F405RGT6.8 15.19,15.97 v15.57,15.59 | v25.72,8.49 25.87,8.63 R4.1 R5.2
  Bottom 0.2: v15.57,15.59 15.85,15.31 15.85,12.6 16.66,11.79 17.34,11.79 17.35,11.78 17.48,11.78 17.86,12.16 18.87,12.16 19.18,11.86 19.18,8.25 18.49,7.57 18.49,5.69 19,5.18 21.22,5.18 21.52,5.47 21.52,7 22.52,8 25.23,8 v25.72,8.49

## Text on the board
tTest: Nightfall-mini v1.3